# Altium PCB MAGI'sBatteryPower.PcbDoc
Units mil, origin at the board's own origin, x right, y up, seen from the top; angles counter-clockwise.
Board outline 6000 x 4000 mil, 2 copper layers (Top Layer, Bottom Layer); 31 components, 17 nets, 107 pads, 154 vias.
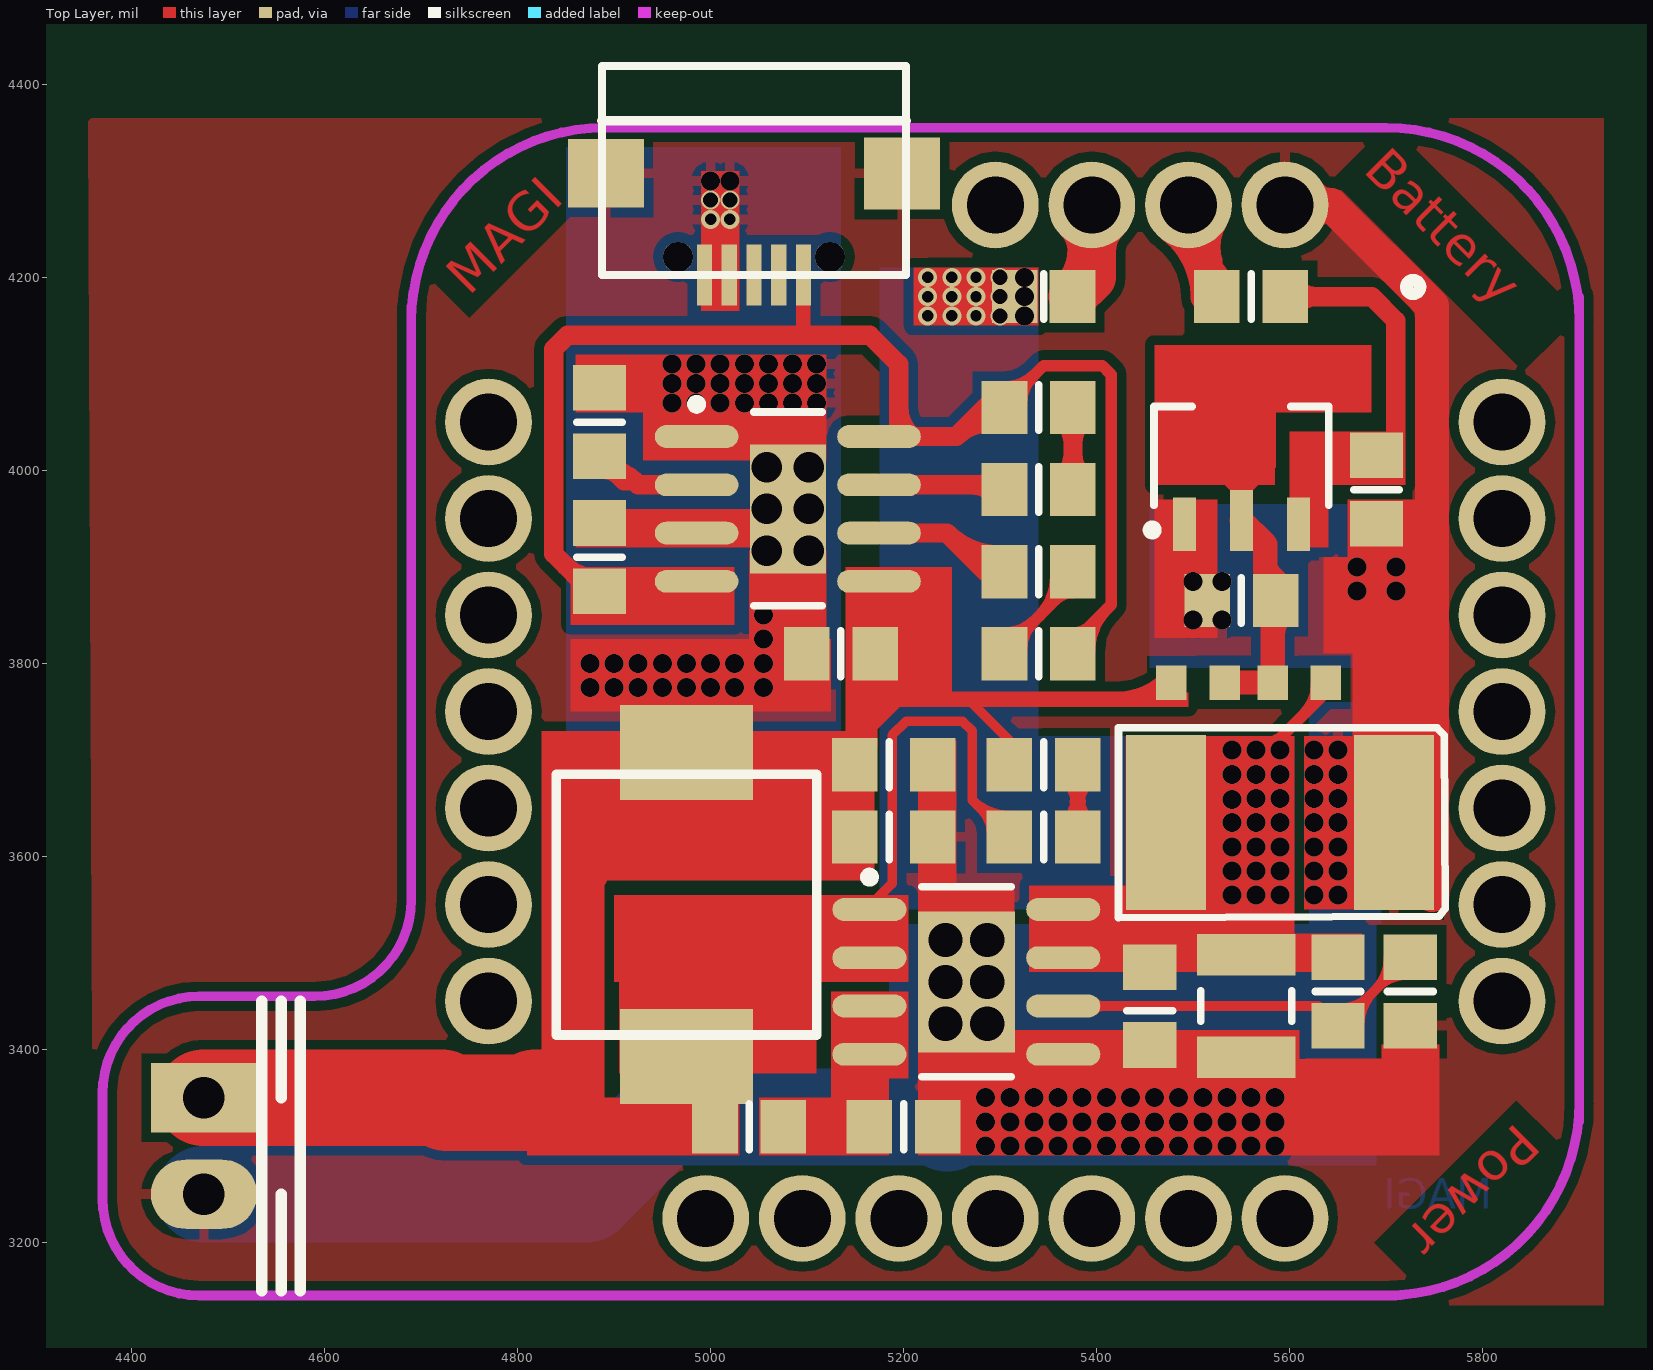
[diagram p0: Top Layer view]
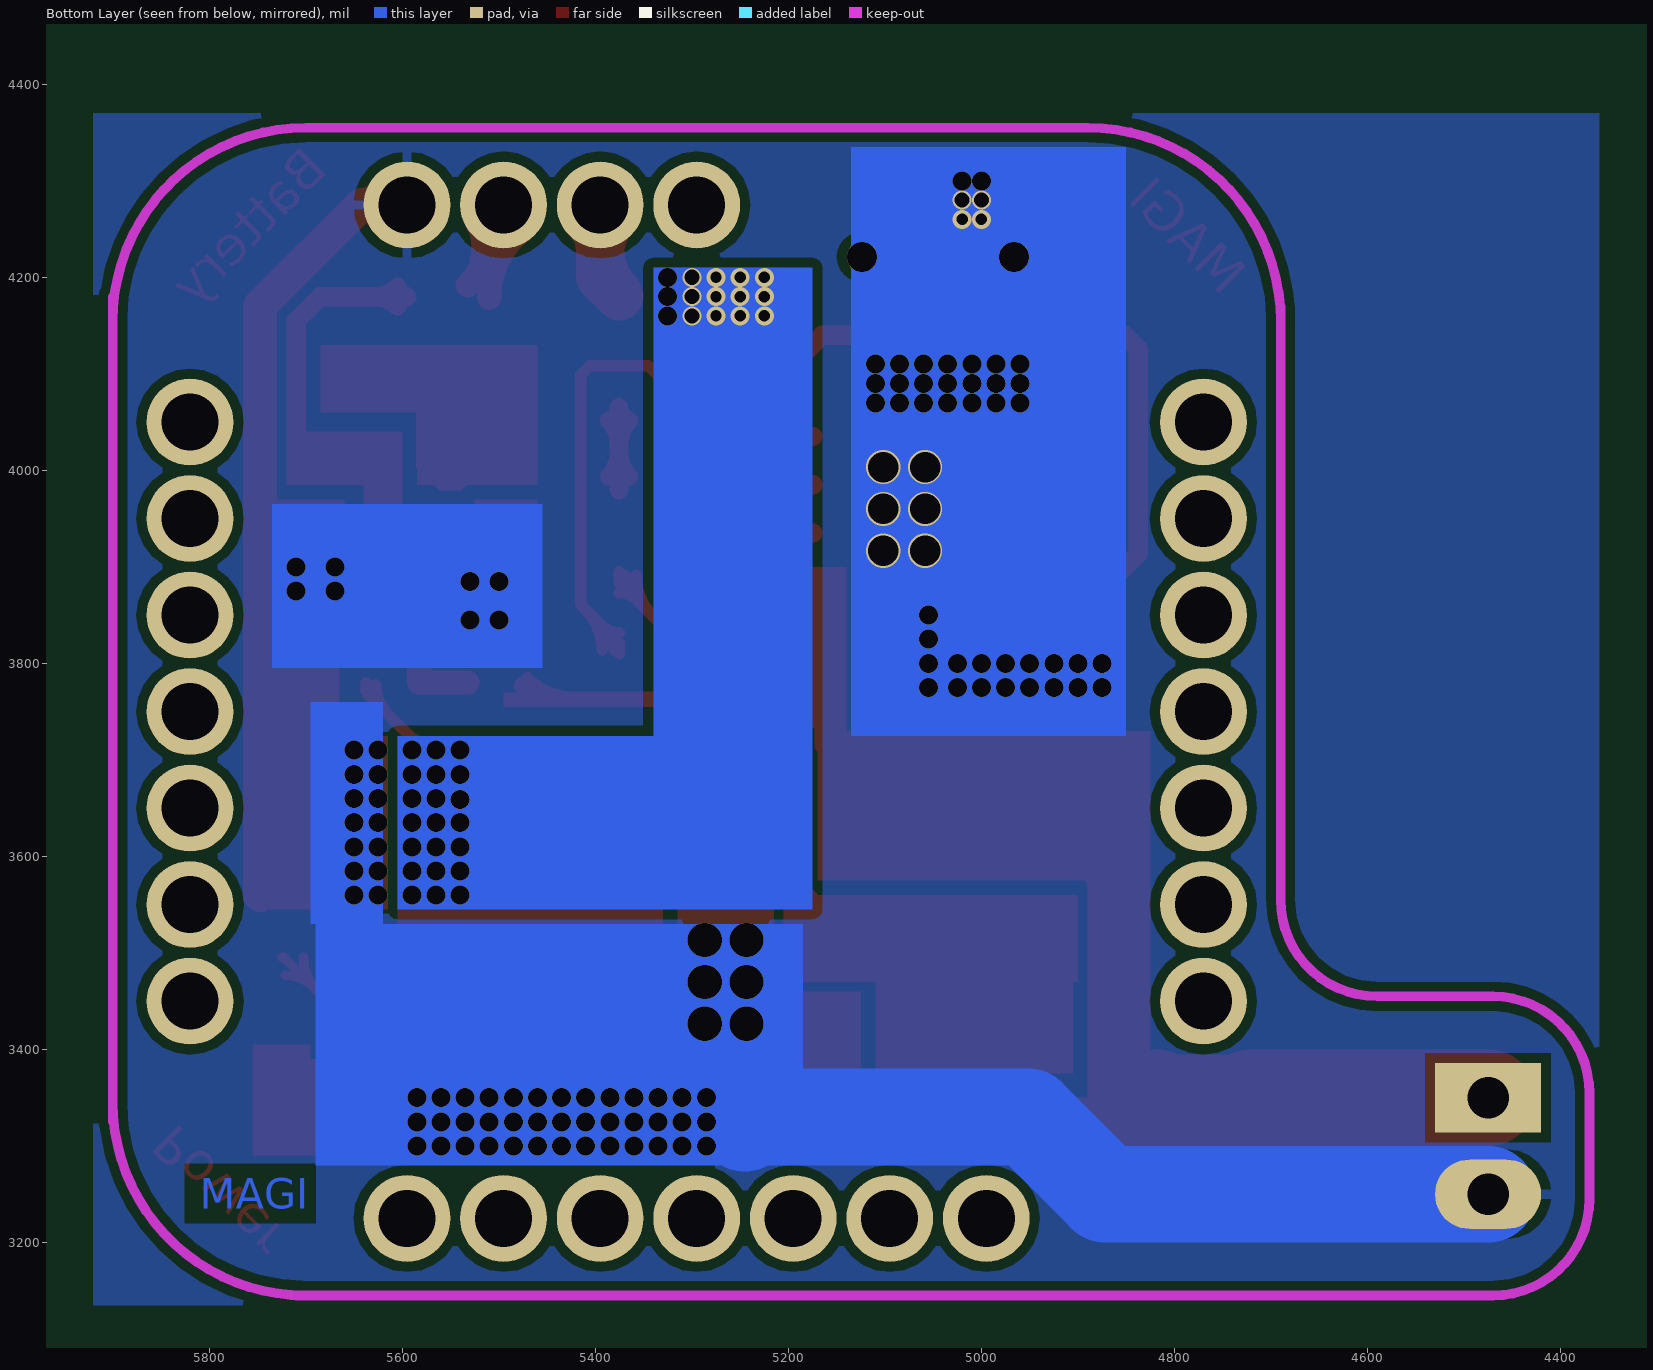
[diagram p1: Bottom Layer view, seen from below]

## Layer stack, top to bottom
Top Solder: solder mask 0.4, Solder Resist, Dk 3.5
Top Layer: signal copper 1.4
Dielectric1: dielectric 12.6, FR-4, Dk 4.8
Bottom Layer: signal copper 1.4
Bottom Solder: solder mask 0.4, Solder Resist, Dk 3.5

## Board outline
1000,1000 7000,1000 7000,5000 1000,5000

## Design rules (kind name [scope] priority, off if disabled: settings)
Clearance [All] p1: gap=10
PolygonConnect [All] p1: connectstyle=Relief reliefconductorwidth=10 reliefentries=4 polygonreliefangle="90 Angle" airgapwidth=10
RoutingVias [All] p1: holewidth=28 width=50 viastyle="Through Hole" minholewidth=28 minwidth=50 maxholewidth=28 maxwidth=50
SolderMaskExpansion [All] p1: expansion=4
Width [All] p1: maxlimit=100 minlimit=10 preferedwidth=30
29 further rules are at their usual default settings.

## Components (designator, comment, footprint, x,y, rotation, side; value= is the part's Value field where it differs from the comment)
C1 "TAN Cap" TAN-D-7343 5590,3635 r0 top
C2 "22uf" 14-1210 5555,3445 r270 top
C4 "10uf" 6-0805_N#1 5455,3440 r270 top
C5 "10uf" 6-0805_N#2 5550,3865 r180 top
C6 "10uf" 6-0805_N#2 5690,3980 r270 top
C7 "10uf" 6-0805_N#3 5185,3620 r0 top
C8 "1uf" 6-0805_N#2 5200,3320 r0 top
C9 "10uf" 6-0805_N#3 5185,3695 r0 top
C10 "10uf" 6-0805_N#2 4885,3910 r90 top
C11 "10uf" 6-0805_N#2 5135,3810 r180 top
D1 "LED" 6-0805_N#2 5345,3695 r0 top
D2 "LED" 6-0805_N#2 5340,3980 r180 top
D3 "LED" 6-0805_N#2 5340,3895 r180 top
J1 "MAGI-M8" MAGI-M8 5295,3750 r0 top
J2 "CON2" CON2 4475,3350 r270 top
L1 "INDUCTOR" 7*7 4965,3550 r90 top
R1 "000" 1608[0603]#1 5560,4180 r0 top
R2 "000" 1608[0603]#2 5505,3780 r0 top
R3 "000" 1608[0603]#2 5610,3780 r0 top
R4 "1K" 6-0805_N#2 5345,3620 r180 top
R5 "316kΩ" 6-0805_N#2 5650,3460 r270 top
R6 "4.7" 6-0805_N#2 5040,3320 r0 top
R7 "100kΩ" 6-0805_N#2 5725,3460 r270 top
R8 "RPROG" 6-0805_N#2 4885,4050 r270 top
R9 "1K" 6-0805_N#2 5340,4065 r180 top
R10 "1K" 6-0805_N#2 5340,3810 r0 top
R11 "000" 6-0805_N#4 5345,4180 r0 top
U1 "USB" MicroUSB 5045,4225 r0 top
U2 "HS7333" HS7333 5550,4015 r90 top
U3 "G5177B" G5177B 5265,3470 r0 top
U4 "TP4056" TP4056 5080,3960 r0 top

## Footprints (in the part's own frame and the unit in brackets; to place one, negate y for a bottom-side part, rotate by r counter-clockwise, add the part's x,y. Pads: shape width x height; smd on the part's side, far side on the other; paste and mask are expansions set on the pad)
6-0805_N#1 [mm] "Chip Resistor, Body 2.0x1.2mm, IPC Medium Density"
  rect 1.2x1.4 smd: 1(-1.143,0) 2(0.9,0)
  silkscreen extent 0,-0.6 0,0.6, body extent -1.07,-0.7 1.07,0.7, height 0.7
6-0805_N#2 [mm] "Chip Resistor, Body 2.0x1.2mm, IPC Medium Density"
  rect 1.2x1.4 smd: 1(-0.9,0) 2(0.9,0)
  silkscreen extent 0,-0.6 0,0.6, body extent -1.07,-0.7 1.07,0.7, height 0.7
6-0805_N#3 [mm] "Chip Resistor, Body 2.0x1.2mm, IPC Medium Density"
  rect 1.2x1.4 smd: 1(-0.9,0) 2(1.143,0)
  silkscreen extent 0,-0.6 0,0.6, body extent -1.07,-0.7 1.07,0.7, height 0.7
6-0805_N#4 [mm] "Chip Resistor, Body 2.0x1.2mm, IPC Medium Density"
  rect 1.2x1.4 smd: 1(-0.762,0) 2(0.762,0)
  silkscreen extent 0,-0.6 0,0.6, body extent -1.07,-0.7 1.07,0.7, height 0.7
7*7 [mil]
  rect 98.43x137.8 smd: 1(-157.5,-10) 2(157.5,-10)
  silkscreen extent -135,-145 135,125
14-1210 [mm] "Chip Resistor, Body 3.2x2.5mm, IPC High Density"
  rect 1.1x2.6 smd: 1(-1.35,0) 2(1.35,0)
  silkscreen extent -0.4,-1.2 0.4,1.2, body extent -1.68,-1.32 1.68,1.32, height 0.9
1608[0603]#1 [mm] "Chip Capacitor, Body 1.6x0.8mm, IPC High Density"
  rect 1.2x1.4 smd: 1(-0.9,0) 2(0.9,0)
  silkscreen extent 0,-0.6 0,0.6, body extent -1.07,-0.7 1.07,0.7, height 0.7
1608[0603]#2 [mm] "Chip Capacitor, Body 1.6x0.8mm, IPC High Density"
  rect 0.8x0.9 smd: 1(-0.7,0) 2(0.7,0)
  body extent -0.87,-0.48 0.87,0.48, height 1.3
CON2 [mil]
  rect 72x110 hole 43.31: 1(0,0)
  oval 72x110 hole 43.31: 2(100,0)
  silkscreen extent -100,60 200,100
G5177B [mm]
  oval 1.95x0.6 smd: 1(-2.55,1.905) 2(-2.55,0.635) 3(-2.55,-0.635) 4(-2.55,-1.905) 5(2.55,-1.905) 6(2.55,-0.635) 7(2.55,0.635) 8(2.55,1.905)
  rect 2.55x3.71 smd: 9(0,0)
  silkscreen extent -2.67,-2.5 1.17,2.88, body extent -2,-2.5 2,2.5, height 1.65
HS7333 [mm] "SOT89, 3-Leads, Body 4.50x2.50mm, Pitch 1.50mm, Lead Span 4.1mm, IPC Medium Density"
  rect 1.4x0.6 smd: 1(-1.8,1.5) 3(-1.8,-1.5)
  rect 1.6x0.6 smd: 2(-1.7,0)
  Top Layer region: -0.9,0.3 -0.3,0.9 1.9,0.9 2.5,0.3 2.5,-0.3 1.9,-0.9 -0.3,-0.9 -0.9,-0.3
  silkscreen extent -2.07,-2.3 1.3,2.47, body extent -1.3,-2.3 1.3,2.3, height 1.6
MAGI-M8 [mil]
  round 90 hole 59.06: 1(300,525) 2(200,525) 3(100,525) 4(0,525) 8(-525,300) 9(-525,200) 10(-525,100) 11(-525,0) 12(-525,-100) 13(-525,-200) 14(-525,-300) 15(-300,-525) 16(-200,-525) 17(-100,-525) 18(0,-525) 19(100,-525) 20(200,-525) 21(300,-525) 22(525,-300) 23(525,-200) 24(525,-100) 25(525,0) 26(525,100) 27(525,200) 28(525,300)
  Keep-Out Layer lines w10: -605,-155 -605,290 -605,420 ; -605,405 cw(c-405,405) -405,605 ; -355,-605 415,-605 ; 405,-605 ccw(c405,-405) 605,-405 ; 405,605 cw(c405,405) 605,405 ; 605,-425 605,430
MicroUSB [mm]
  round 0.8 hole 0.8: 0(-2,-0.1) 0(2,-0.1)
  rect 0.4x1.6 smd: 1(1.3,-0.576) 2(0.65,-0.576) 3(0,-0.576) 4(-0.65,-0.576) 5(-1.3,-0.576)
  rect 2x1.8 smd: 6(-3.9,2.1)
  rect 2x1.9 smd: 7(3.9,2.1)
  silkscreen extent -4,-0.58 4,4.92, body extent -4.1,-0.68 4.1,5.02, height 3
TAN-D-7343 [mm]
  rect 2.1x4.6 smd: 1(-3,0) 2(3,0)
  silkscreen extent -4.25,-2.5 4.34,2.5, body extent -3.65,-2.15 3.65,2.15, height 2.9
TP4056 [mm] "SOIC, 8-Leads, Body 4.90x3.90mm, Pitch 1.27mm, Thermal Pad 3.40.2x2.00.2mm, IPC Medium Density"
  oval 2.2x0.6 smd: 1(-2.4,1.905) 2(-2.4,0.635) 3(-2.4,-0.635) 4(-2.4,-1.905) 5(2.4,-1.905) 6(2.4,-0.635) 7(2.4,0.635) 8(2.4,1.905)
  rect 2x3.4 smd: 9(0,0)
  silkscreen extent -2.52,-2.55 0.9,2.88, body extent -2,-2.55 2,2.55, height 1.75

## Part data
C1 C2 C4 C5 C6 C7 C8 C9 C10 C11: library part "CAPACITOR POL", "Capacitor"
J2: "Connector"
R1 R2 R3 R4 R5 R6 R7 R8 R9 R10 R11: library part RES1

## Via types
v1: diameter 19.68, hole 19.68, Top Layer to Bottom Layer, 126 vias
v2: diameter 19.68, hole 11.81, Top Layer to Bottom Layer, 11 vias
v3: diameter 35.43, hole 31.5, Top Layer to Bottom Layer, 6 vias
v4: diameter 35.43, hole 35.43, Top Layer to Bottom Layer, 6 vias
v5: diameter 19.68, hole 15.75, Top Layer to Bottom Layer, 5 vias

## Nets (pads, with @x,y where several pads share a name; then routed paths per layer and width w, separated by ;. In a path a pad name is that pad's centre, name@x,y a point inside that pad or via, vN(x,y) a via of type N, cw(c..) or ccw(c..) an arc to the next point about the centre after c; other vN are vias at no path point)
3.3V: C6.1 R1.2 U2.3 | length 324.4
  Top Layer w20: R1.2 5685,4180 5710,4155 5710,4035.43 C6.1 ; R1.2@5605.07,4170.37 cw(c5628.32,4147.11) 5628.32,4180 cw(c5628.32,4212.89) R1.2@5605.07,4189.63
5V: C1.1 C2.1 C4.1 R3.2 R5.1 R11.1 U3.7 U3.8 | length 691
  Top Layer w12: v1@5531.84,3658.81 cw(c5545.5,3658.81) 5535.84,3668.47 ; v1@5535.94,3677.93 ccw(c5541.54,3687.68) 5550.65,3681.09 ; 5540,3645 5540,3672.63 ; v1@5540,3688.84 ccw(c5540,3727.99) 5567.68,3700.31 ; v1@5541.91,3688.33 ccw(c5548.21,3699.28) v1@5558.45,3691.89 ; v1@5542.56,3665.1 cw(c5571.3,3648.51) v1@5565.65,3681.21 ; v1@5543.84,3658.81 cw(c5586.47,3658.81) v1@5556.33,3688.95 ; v1@5545.27,3687.37 ccw(c5528.93,3715.65) v1@5561.2,3710.6 ; v1@5547.68,3679.58 cw(c5556.37,3673.21) v1@5562.73,3681.9 ; 5549.69,3682.32 ccw(c5522.01,3710) v1@5561.16,3710 ; 5554.78,3689.26 cw(c5563.46,3682.9) v1@5569.82,3691.58 ; 5555.36,3687.28 cw(c5565.63,3681.36) v1@5563.61,3693.04 ; v1@5558.42,3680.18 cw(c5567.1,3686.54) 5560.74,3695.22 ; 5561.88,3694.51 cw(c5590,3666.4) v1@5590,3706.16 ; v1@5564.56,3681.18 ccw(c5561.13,3651.5) 5540,3672.63 ; v1@5565,3713.84 ccw(c5565,3752.99) 5592.68,3725.31 ; 5567.01,3699.92 ccw(c5560.81,3710.66) v1@5573.06,3708.74 ; v1@5567.37,3690.39 cw(c5595.37,3674.23) v1@5590.57,3706.2 ; v1@5568.1,3687.27 cw(c5576.79,3693.63) v1@5570.42,3702.32 ; v1@5568.84,3685 cw(c5608.6,3685) 5580.49,3713.12 ; 5579.82,3711.96 cw(c5590.64,3705.7) v1@5588.79,3718.07 ; v1@5583.42,3705.18 cw(c5592.1,3711.54) 5585.74,3720.22 ; v1@5593.1,3712.27 cw(c5601.79,3718.63) 5595.42,3727.32 ; 5615.37,3748 ccw(c5585.34,3778.03) R3.2@5627.81,3778.03 ; R3.2 5637.56,3770.19 5540,3672.63
  other v1: 5540,3560 5565,3560 5590,3560 5540,3585 5565,3585 5590,3585 5540,3610 5565,3610 5590,3610 5540,3635 5565,3635 5590,3635 5540,3658.81 5565,3660 5590,3660 5540,3685 5565,3685 5590,3685 5540,3710 5565,3710 5590,3710 5325,4160 5325,4180 5325,4200
  other v2: 5225,4160 5250,4160 5275,4160 5225,4180 5250,4180 5275,4180 5225,4200 5250,4200 5275,4200
  other v5: 5300,4160 5300,4180 5300,4200
BAT: C7.1 C9.1 C11.1 D1.1 J2.1 L1.2 R2.1 R6.1 U4.5 | length 1252.7
  Top Layer w10: C9.1 5168.19,3713.62 5168.19,3733.87 5194.32,3760 ; 5264.5,3765 5309.57,3719.93 D1.1
  Top Layer w12: 5210,3765 5264.5,3765 5462.44,3765 R2.1 ; 5422.45,3765 ccw(c5422.45,3833.03) R2.1@5470.55,3784.92 ; 5451.42,3765 ccw(c5451.42,3804.06) R2.1@5479.03,3776.44
  Top Layer w50: 4825,3350 4865,3390 4865,3579.5 4870,3584.5 4870,3700
  Top Layer w100: J2.1 4721.51,3350 4726.51,3345 4813.49,3345 4818.49,3350 4825,3350
GND: C1.2 C2.2 C4.2 C5.2 C6.2 C7.2 C8.2 C9.2 C10.2 C11.2 J1.1 J2.2 R7.2 R8.1 U1.4 U1.5 U1.6 U1.7 U2.1 U3.5 U3.9 U4.1 U4.3 U4.9 | length 1924.2
  Top Layer w35: J1.1 5643.03,4275 ; J1.1@5618.72,4261.08 cw(c5643.03,4246.8) 5643.03,4275 ; J1.1@5618.72,4288.92 ccw(c5643.03,4303.2) 5643.03,4275 ; C1.2@5691.25,3701.07 ccw(c5555.46,3836.86) 5747.5,3836.86 ; C1.2@5716,3676.32 ccw(c5639.96,3752.36) 5747.5,3752.36 ; C1.2@5740.75,3651.57 ccw(c5724.46,3667.86) C1.2@5747.5,3667.86 ; C1.2@5747.5,3560 5747.5,4170.53 5643.03,4275
  Bottom Layer w100: J2.2 4871.51,3250 4951.51,3330 5238.49,3330 5245,3323.49
  other v1: 5285,3300 5310,3300 5335,3300 5360,3300 5385,3300 5410,3300 5435,3300 5460,3300 5485,3300 5510,3300 5535,3300 5560,3300 5585,3300 5285,3325 5310,3325 5335,3325 5360,3325 5385,3325 5410,3325 5435,3325 5460,3325 5485,3325 5510,3325 5535,3325 5560,3325 5585,3325 5285,3350 5310,3350 5335,3350 5360,3350 5385,3350 5410,3350 5435,3350 5460,3350 5485,3350 5510,3350 5535,3350 5560,3350 5585,3350 5625,3560 5650,3560 5625,3585 5650,3585 5625,3610 5650,3610 5625,3635 5650,3635 5625,3660 5650,3660 5625,3685 5650,3685 5625,3710 5650,3710 4875,3775 4900,3775 4925,3775 4950,3775 4975,3775 5000,3775 5025,3775 5055,3775 4875,3800 4900,3800 4925,3800 4950,3800 4975,3800 5000,3800 5025,3800 5055,3800 5055,3825 5500,3845 5530,3845 5055,3850 5670,3875 5710,3875 5500,3885 5530,3885 5670,3900 5710,3900 4960,4070 4985,4070 5010,4070 5035,4070 5060,4070 5085,4070 5110,4070 4960,4090 4985,4090 5010,4090 5035,4090 5060,4090 5085,4090 5110,4090 4960,4110 4985,4110 5010,4110 5035,4110 5060,4110 5085,4110 5110,4110 5000,4300 5020,4300
  other v2: 5000,4260 5020,4260
  other v3: 5058.35,3916.69 5101.65,3916.69 5058.35,3960 5101.65,3960 5058.35,4003.31 5101.65,4003.31
  other v4: 5243.35,3426.69 5286.65,3426.69 5243.35,3470 5286.65,3470 5243.35,3513.31 5286.65,3513.31
  other v5: 5000,4280 5020,4280
HSIN: C5.1 R2.2 R3.1 U2.2 | length 309.1
  Top Layer w25: R2.2 R3.1 5582.44,3862.01 C5.1 5585.43,3885.88 5574.74,3896.57 ; U2.2 5574.74,3923.33 5574.74,3896.57 ; C5.1@5576.42,3875.46 ccw(c5563.21,3885.03) 5574.74,3896.57 ; 5582.44,3826.99 cw(c5619.51,3826.99) C5.1@5593.3,3853.2 ; C5.1@5588.01,3879.76 cw(c5592.03,3896.57) 5574.74,3896.57
NetC3_2: R5.2 R7.1 U3.6 | length 585.4
  Top Layer w10: U3.6 5629.57,3445 R5.2 5651.53,3424.57 5722.39,3495.43 R7.1 ; U3.6@5396.78,3440.18 cw(c5408.41,3428.56) 5408.41,3445 cw(c5408.41,3461.44) U3.6@5396.78,3449.82 ; R5.2@5653.94,3443.19 ccw(c5653.94,3482.33) 5681.61,3454.65 ; R5.2@5662.56,3424.57 cw(c5689.19,3424.57) R5.2@5670.36,3443.4 ; R5.2@5672.56,3424.57 cw(c5723.33,3424.57) 5687.43,3460.47 ; 5688.33,3461.37 ccw(c5654.27,3495.43) R7.1@5702.44,3495.43 ; 5691.55,3464.58 cw(c5721.06,3435.07) R7.1@5721.06,3476.81
NetC8_1: C8.1 R6.2 U3.3 U3.4
NetD1_2: D1.2 R4.1 | length 300.9
  Top Layer w10: R4.1@5367.27,3637.1 ccw(c5335.48,3668.89) 5380.43,3668.89 ccw(c5425.39,3668.89) R4.1@5393.6,3637.1 ; D1.2@5367.27,3677.9 cw(c5335.48,3646.11) 5380.43,3646.11 cw(c5425.39,3646.11) D1.2@5393.6,3677.9 ; D1.2@5369.77,3675.8 cw(c5359.27,3660.76) 5376.98,3656.02 ; D1.2@5371.12,3674.94 cw(c5358.44,3652.97) 5382.94,3659.53 ; 5377.92,3659.53 cw(c5402.43,3652.97) D1.2@5389.74,3674.94 ; R4.1 D1.2 ; 5383.88,3656.02 cw(c5401.6,3660.76) D1.2@5391.1,3675.8
NetD2_1: D2.1 R9.1 | length 188.3
  Top Layer w20: D2.1@5365.8,3993.57 ccw(c5342.55,4016.82) 5375.43,4016.82 ccw(c5408.32,4016.82) D2.1@5385.07,3993.57 ; R9.1@5365.8,4051.43 cw(c5342.55,4028.18) 5375.43,4028.18 cw(c5408.32,4028.18) R9.1@5385.07,4051.43 ; D2.1 R9.1
NetD2_2: D2.2 U4.7 | length 183.8
  Top Layer w20: U4.7 5299.57,3985 D2.2 ; 5269.11,3985 cw(c5269.11,3948.48) D2.2@5294.93,3974.3 ; 5274.25,3985 ccw(c5274.25,4014.26) D2.2@5294.93,3993.57
NetD3_1: D3.1 R10.1 | length 272.4
  Top Layer w12: R10.1 5304.57,3812.94 5375.43,3883.81 D3.1 ; R10.1@5304.57,3831.56 ccw(c5304.57,3876.5) 5336.35,3844.72 ; R10.1@5322.19,3813.94 cw(c5362.33,3813.94) 5333.95,3842.32 ; 5340.22,3848.6 ccw(c5297.75,3891.06) D3.1@5357.81,3891.06 ; 5357.73,3866.11 cw(c5375.43,3848.41) D3.1@5375.43,3873.44 ; D3.1@5360.71,3869.08 ccw(c5338.72,3891.06) D3.1@5369.81,3891.06
NetD3_2: D3.2 U4.6 | length 242.7
  Top Layer w20: U4.6 5245,3935 ; 5276.62,3903.38 ccw(c5302.86,3929.61) D3.2@5304.92,3892.57 ; D3.2@5303.81,3912.54 cw(c5299.51,3989.51) 5245,3935 ; D3.2 5285,3895 5245,3935
NetJ1_2: J1.2 R1.1 | length 398.3
  Top Layer w25: J1.2@5475.25,4249.19 cw(c5421.39,4178.83) R1.1@5510,4178.83 ; J1.2@5481.53,4245.42 cw(c5450.09,4176.36) R1.1@5523.38,4196 ; J1.2@5490.44,4269.04 cw(c5460.13,4229.44) 5510,4229.44 ; J1.2 5510,4260 R1.1@5510,4180 ; J1.2@5510,4245.96 ccw(c5586.59,4245.96) R1.1@5532.43,4191.8 ; 5517.69,4217.27 cw(c5570.48,4231.42) J1.2@5523.15,4258.75
NetL1_1: L1.1 R4.2 U3.1 U3.2 | length 503.8
  Top Layer w10: U3.1 5164.61,3548.39 5188.19,3571.98 5188.19,3725.58 5202.61,3740 5261.21,3740 5270.94,3730.27 5270.94,3658.62 R4.2 ; 5271.06,3658.51 ccw(c5309.57,3697.02) R4.2@5309.57,3642.56 ; 5280.56,3649.01 cw(c5255.49,3623.94) R4.2@5290.94,3623.94 ; R4.2@5288.13,3641.44 ccw(c5309.57,3662.88) R4.2@5309.57,3632.56
NetR8_2: R8.2 U4.2 | length 229.4
  Top Layer w20: R8.2 4910.51,3989.06 ; R8.2@4889.69,4000.97 cw(c4891.94,3960.16) 4920.84,3989.06 ; R8.2@4902.44,4012.8 ccw(c4930.57,4009.11) 4910.51,3989.06 ; R8.2@4905.47,3994.1 ccw(c4888.94,3977.56) 4888.94,4000.94 cw(c4888.94,3952.62) 4923.11,3986.79 ; U4.2 4924.9,3985 4920.84,3989.06 ; 4910.51,3989.06 4920.84,3989.06
VCC: C10.1 R9.2 R10.2 U1.1 U4.4 U4.8 | length 1703.4
  Top Layer w12: R9.2 5304.57,4067.94 5345.18,4108.56 5405.68,4108.56 5415.06,4099.19 5415.06,3860.81 5375.43,3821.19 R10.2 ; R9.2@5304.57,4086.56 ccw(c5304.57,4131.5) 5336.35,4099.72 ; R9.2@5322.19,4068.94 cw(c5362.33,4068.94) 5333.95,4097.32 ; R10.2@5375.43,3831.56 ccw(c5375.43,3856.59) 5393.13,3838.89 ; R10.2@5381.06,3813.94 cw(c5412.14,3813.94) R10.2@5390.16,3835.92 ; R10.2@5393.06,3813.94 cw(c5453.11,3813.94) 5410.65,3856.4
  Top Layer w15: U1.1 5096.18,4143.82 5100,4140
  Top Layer w20: 4849.85,3901.12 ccw(c4881.06,3932.33) C10.1@4881.06,3888.19 ; C10.1@4861.11,3889.86 cw(c4845.81,3874.57) C10.1@4867.44,3874.57 ; C10.1 4876.4,3874.57 4837.44,3913.53 4837.44,4115 4837.44,4125.73 4851.72,4140 5100,4140 5165,4140 5195,4110 U4.8@5195,4035 ; U4.8 5254.57,4035 ; 5195,4065.89 ccw(c5236.87,4065.89) U4.8@5207.26,4036.28 ; 5279.47,4059.9 cw(c5299.27,4040.1) R9.2@5306.13,4067.25 ; R9.2@5301.23,4047.86 ccw(c5289.21,4000.36) 5254.57,4035 ; R9.2 5294.57,4075 5254.57,4035
VOUT: J1.3 R11.2 | length 230.1
  Top Layer w50: R11.2 5395,4200 J1.3 ; R11.2@5375.97,4182.96 ccw(c5330.04,4228.89) 5395,4228.89 ; J1.3@5380.86,4260.86 cw(c5346.72,4226.72) 5395,4226.72 cw(c5443.28,4226.72) J1.3@5409.14,4260.86
pads on no net: J1.4 J1.8 J1.9 J1.10 J1.11 J1.12 J1.13 J1.14 J1.15 J1.16 J1.17 J1.18 J1.19 J1.20 J1.21 J1.22 J1.23 J1.24 J1.25 J1.26 J1.27 J1.28 U1.0 U1.2 U1.3

## Polygon pours and split planes (outlines as drawn)
GND on Top Layer "Keep-Out Layer-No Net" (solid, pour order 6): 4360.4,3135 5925.62,3135 5925.62,4365 4355,4365
GND on Bottom Layer "Keep-Out Layer-No Net" (solid, pour order 8): 4360,4370 5920,4370 5920,3135 4360,3135

## Keep-outs
Keep-Out Layer:
  lines w10: 4550,3145 4470,3145 ; 4690,3650 4690,3555 cw(c4590,3555) 4590,3455 4470,3455 ccw(c4470,3355) 4370,3355 4370,3245 ccw(c4470,3245) 4470,3145 ; 4890,4355 5700,4355 ; 4950,3145 5030,3145 ; 5015,3145 4470,3145

## Other copper
Top Layer:
  rectangle net GND: 5635,3810 5695,3910
  rectangle net GND: 5665,3685 5735,3970
  rectangle net HSIN: 5460,3985 5585,4080
  rectangle net HSIN: 5460,4060 5685,4130
  region net GND: 5030,4310 4990,4310 4990,4165 5030,4165
  rectangle net GND: 5660,3865 5720,3970
  rectangle net 5V: 5210,4150 5340,4210
  rectangle net BAT: 5225,3755 5495,3770
  rectangle net GND: 4855,3750 5125,3825
  rectangle net BAT: 5181.26,3750.68 5185,3760
  rectangle net BAT: 5160,3740 5181.26,3760
  rectangle net BAT: 5140,3730 5170,3755
  rectangle net 3.3V: 5600,3920 5640,4040
  rectangle net 3.3V: 5600,3985 5720,4040
  rectangle net GND: 5460,3826.31 5525,3970
  rectangle net BAT: 5140,3755 5250,3900
  rectangle net GND: 5040,3780 5120,3916.69
  rectangle net GND: 4930,4010 5120,4110
  rectangle net GND: 4860,4060 5120,4120
  rectangle net VCC: 4855,3840 5025,3900
  rectangle net GND: 4860,3920 5080,3960
  rectangle net NetL1_1: 4900,3470 5205,3560
  rectangle net NetL1_1: 4905,3375 5110,3560
  rectangle net BAT: 4830,3575 5170,3730
  rectangle net BAT: 4825,3290 4890,3730
  rectangle net BAT: 4810,3290 5030,3350
  rectangle net NetC8_1: 5050,3290 5185,3350
  rectangle net NetC8_1: 5125,3290 5185,3460
  rectangle net NetC8_1: 5135,3370 5205,3460
  rectangle net 5V: 5330,3480 5605,3570
  rectangle net 5V: 5430,3480 5605,3725
  rectangle net 5V: 5590,3480 5675,3520
  rectangle net GND: 5215,3290 5315,3565
  rectangle net GND: 5215,3290 5610,3420
  rectangle net GND: 5595,3290 5755,3390
  rectangle net GND: 5695,3350 5755,3405
  rectangle net GND: 5215,3565 5255,3720
  rectangle net GND: 5615,3545 5750,3725
  text "Battery" at 5675,4310 h39.37 r315
  text "MAGI" at 4750,4180 h39.37 r45
  text "Power" at 5835,3325 h39.37 r225
Bottom Layer:
  rectangle net GND: 5185,3280 5690,3530
  rectangle net GND: 5620,3530 5695,3760
  rectangle net GND: 5455,3795 5735,3965
  rectangle net GND: 4850,3725 5135,4335
  rectangle net 5V: 5175,3545 5605,3725
  rectangle net 5V: 5175,3545 5340,4210
  text "MAGI" at 5810,3235 h31.5

## Silkscreen, mask and mechanical layers (free items; w line width, h text height)
Top Overlay:
  circle w13: c5727.93,4190 r7.07
Bottom Solder:
  rectangle: 4945,3860 5165,4060
  rectangle: 5125,3370 5410,3540